# Altium PCB sot23-5-op-amp-proto__A.PcbDoc
Units mil, origin at the board's own origin, x right, y up, seen from the top; angles counter-clockwise.
Board outline 750 x 500 mil, 2 copper layers (Top Layer, Bottom Layer), stack 61.7 mil thick; 27 components, 11 nets, 50 pads, 3 vias.
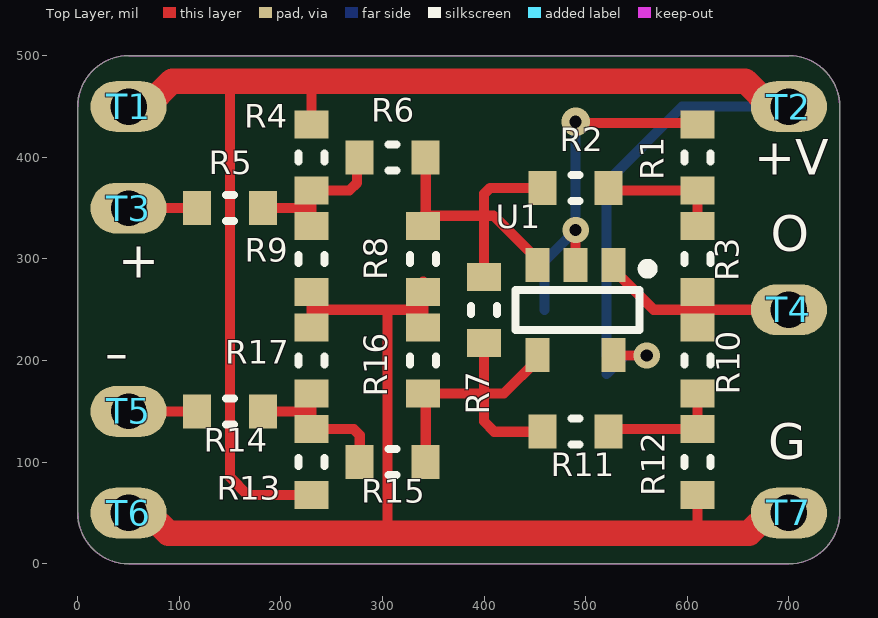
[diagram p0: Top Layer view]
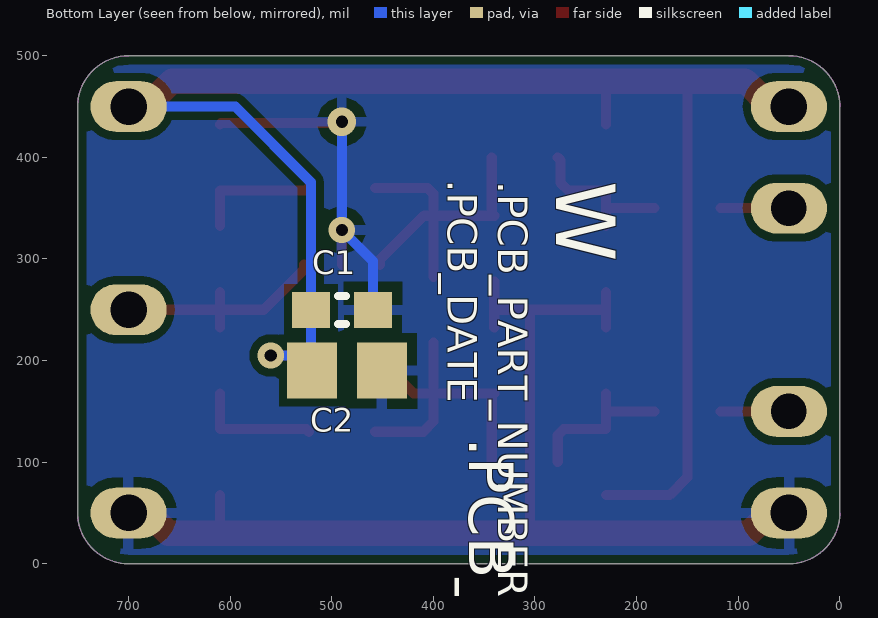
[diagram p1: Bottom Layer view, seen from below]
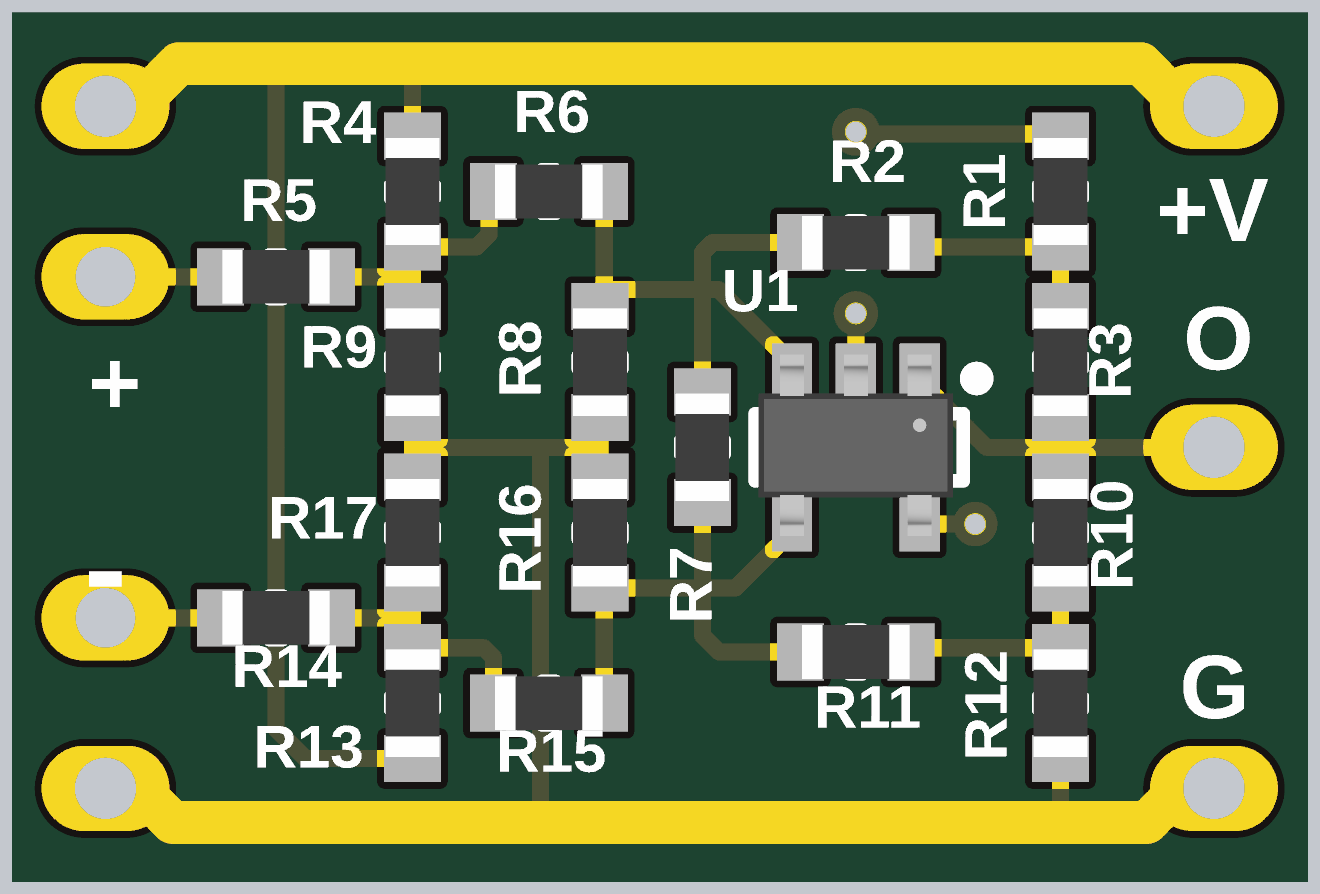
[diagram p2: 3D render of the assembled board from above, using the file's embedded part models]

## Layer stack, top to bottom
Top Solder: solder mask 0.4, Solder Resist, Dk 3.5
Top Layer: signal copper 1.4
Dielectric1: dielectric 58.9, FR-4, Dk 4.8
Bottom Layer: signal copper 1.4
Bottom Solder: solder mask 0.4, Solder Resist, Dk 3.5

## Board outline
0,50 0,450 cw(c50,450) 50,500 700,500 cw(c700,450) 750,450 750,50 cw(c700,50) 700,0 50,0 cw(c50,50)

## Design rules (kind name [scope] priority, off if disabled: settings)
Clearance [All] p1: gap=6 ignorepadtopadclearanceinfootprint=FALSE except(0: Arc-Hole Track-Hole SMDPad-Hole THPad-Hole Via-Hole Fill-Hole Poly-Hole Region-Hole Text-Hole; 8: Arc-Poly Track-Poly SMDPad-Poly THPad-Poly Via-Poly Fill-Poly Poly-Poly)
PolygonConnect [All] p1: connectstyle=Relief reliefconductorwidth=10 reliefentries=4 polygonreliefangle="90 Angle" airgapwidth=10
RoutingVias [All] p1: holewidth=12 width=26 viastyle="Through Hole" minholewidth=12 minwidth=26 maxholewidth=50 maxwidth=75
SilkToSolderMaskClearance SilkscreenOverComponentPads [IsPad] p1: minsilkscreentomaskgap=10 clearancetoexposedcopper=TRUE
SolderMaskExpansion [All] p1: expansion=4 istentingtop=FALSE
SupplyNets "Schematic Supply Nets_1" [InNet('GND')] p1: voltage=0.000
SupplyNets "Schematic Supply Nets" [InNet('+V')] p2: voltage=0.000
Width [All] p1: maxlimit=200 minlimit=6 preferedwidth=6
29 further rules are at their usual default settings.

## Components (designator, comment, footprint, x,y, rotation, side; value= is the part's Value field where it differs from the comment)
C1 "0.1µF" C0603_0.90MM_MD 490,250 r0 bottom
C2 "10µF" C0805_1.40MM_MD 485,190 r0 bottom
R1 "470k" R0603_0.55MM_MD 610,400 r90 top
R2 "470k" R0603_0.55MM_MD 490,370 r180 top
R3 "470k" R0603_0.55MM_MD 610,300 r90 top
R4 "470k" R0603_0.55MM_MD 230,400 r90 top
R5 "470k" R0603_0.55MM_MD 150,350 r180 top
R6 "470k" R0603_0.55MM_MD 310,400 r180 top
R7 "470k" R0603_0.55MM_MD 400,250 r90 top
R8 "470k" R0603_0.55MM_MD 340,300 r90 top
R9 "470k" R0603_0.55MM_MD 230,300 r90 top
R10 "470k" R0603_0.55MM_MD 610,200 r90 top
R11 "470k" R0603_0.55MM_MD 490,130 r180 top
R12 "470k" R0603_0.55MM_MD 610,100 r90 top
R13 "470k" R0603_0.55MM_MD 230,100 r270 top
R14 "470k" R0603_0.55MM_MD 150,150 r180 top
R15 "470k" R0603_0.55MM_MD 310,100 r180 top
R16 "470k" R0603_0.55MM_MD 340,200 r270 top
R17 "470k" R0603_0.55MM_MD 230,200 r270 top
T1 "SOLDER_HOLE" "SOLDER_HOLE -  22AWG" 50,450 r270 top
T2 "SOLDER_HOLE" "SOLDER_HOLE -  22AWG" 700,450 r270 top
T3 "SOLDER_HOLE" "SOLDER_HOLE -  24AWG" 50,350 r270 top
T4 "SOLDER_HOLE" "SOLDER_HOLE -  22AWG" 700,250 r270 top
T5 "SOLDER_HOLE" "SOLDER_HOLE -  24AWG" 50,150 r270 top
T6 "SOLDER_HOLE" "SOLDER_HOLE -  22AWG" 50,50 r270 top
T7 "SOLDER_HOLE" "SOLDER_HOLE -  22AWG" 700,50 r90 top
U1 "OPA320AIDBVR" SOT23-5 490,250 r270 top

## Footprints (in the part's own frame and the unit in brackets; to place one, negate y for a bottom-side part, rotate by r counter-clockwise, add the part's x,y. Pads: shape width x height; smd on the part's side, far side on the other; paste and mask are expansions set on the pad)
C0603_0.90MM_MD [mm] "Capacitor 0603 - Medium Density"
  rect 0.95x0.9 smd: 1(-0.775,0) 2(0.775,0)
  silkscreen extent -0.1,-0.35 0.1,0.35, body extent -0.8,-0.4 0.8,0.4, height 0.9
C0805_1.40MM_MD [mm] "Capacitor - 0805 - Medium Density"
  rect 1.25x1.4 smd: 1(-0.875,0) 2(0.875,0)
  body extent -1,-0.62 1,0.63, height 1.45
R0603_0.55MM_MD [mm] "Resistor 0603 Medium Density"
  rect 0.7x0.85 smd: 1(-0.825,0) 2(0.825,0)
  silkscreen extent -0.1,-0.33 0.1,0.33, body extent -0.8,-0.4 0.8,0.4, height 0.55
"SOLDER_HOLE -  22AWG" [mil]
  oval 50x75 hole 36: 1(0,0)
"SOLDER_HOLE -  24AWG" [mil]
  oval 50x75 hole 35: 1(0,0)
SOT23-5 [mm] "SOT23, 5-Leads, Body 3.1x2.6mm (max), Pitch 0.95mm, IPC High Density"
  rect 0.85x0.6 smd: 1(-1.125,0.95) 2(-1.125,0) 3(-1.125,-0.95) 4(1.125,-0.95) 5(1.125,0.95)
  silkscreen extent -1.15,-1.5 0.5,1.93, body extent -1.38,-1.45 1.32,1.45, height 1.15

## Part data
C1: library part GCJ188R71C104KA01D, "CAP CER 0.1UF 16V X7R 0603", Manufacturer="Murata Electronics", Operating Temperature="-55°C ~ 125°C", Package=0603, Ratings=AEC-Q200, Supplier Part Number 1=490-5796-1-ND, Temperature Coefficient=X7R, Tolerance=±10%, Voltage - Rated=16V, Category=Capacitors, ComponentLink1Description="Datasheet (Internal)", ComponentLink1URL=https://www.murata.com/~/media/webrenewal/support/library/catalog/products/capacitor/mlcc/c03e.ashx?la=en-us, ComponentLink2Description="Datasheet (External)", ComponentLink2URL=https://www.murata.com/~/media/webrenewal/support/library/catalog/products/capacitor/mlcc/c03e.ashx?la=en-us, Manufacturer Part Number=GCJ188R71C104KA01D, Substitution Notes="0.1µF , 16V , ±10% , X7R , -55°C ~ 125°C , AEC-Q200 , 0603", Supplier 1=Digikey, Thickness (Max)=0.90MM
C2: library part GCM21BR71A106KE22K, "CAP CER 10UF 10V X7R 0805", Manufacturer="Murata Electronics", Operating Temperature="-55°C ~ 125°C", Package=0805, Ratings=AEC-Q200, Supplier Part Number 1=490-14531-1-ND, Temperature Coefficient=X7R, Tolerance=±10%, Voltage - Rated=10V, Category=Capacitors, ComponentLink1Description="Datasheet (Internal)", ComponentLink1URL=https://search.murata.co.jp/Ceramy/image/img/A01X/G101/ENG/GCM21BR71A106KE22-01.pdf, ComponentLink2Description="Datasheet (External)", ComponentLink2URL=https://search.murata.co.jp/Ceramy/image/img/A01X/G101/ENG/GCM21BR71A106KE22-01.pdf, Manufacturer Part Number=GCM21BR71A106KE22K, Substitution Notes="10µF , 10V , ±10% , X7R , -55°C ~ 125°C , AEC-Q200 , 0805", Supplier 1=Digikey, Thickness (Max)=1.40MM
R1 R2 R3 R4 R5 R6 R7 R8 R9 R10 R11 R12 R13 R14 R15 R16 R17: library part ERJ-3EKF4703V, "RES 470K OHM 1/10W 1% 0603 SMD", Limiting Element Voltage=75, Manufacturer="Panasonic Electronic Components", Maximum Overload Voltage=150, Maximum Working Voltage=75.0V, Package="0603 (1608 Metric)", Package Power="0603  (0.1W)", Power (Watts)="0.1W- 1/10W", Ratings=AEC-Q200, Sort Value=470000, Sort Value Package=603_470000, Supplier Package=0603, Supplier Part Number 1=P470KHCT-ND, Temperature Coefficient=±100ppm/°C, Tolerance=±1%, Category=Resistors, ComponentLink1Description="Internal Datasheet", ComponentLink1URL="datasheets\Panasonic Electronic Components\AOA0000CE2.pdf", ComponentLink2Description="External Datasheet", ComponentLink2URL=http://industrial.panasonic.com/www-data/pdf/AOA0000/AOA0000CE2.pdf, Composition="Thick Film", Features=-, Height=0.55MM, Manufacturer Part Number=ERJ-3EKF4703V, Number of Terminations=2, Packaging="Cut Tape (CT)", Resistance (Ohms)=470k, Size / Dimension="0.063\" L x 0.031\" W (1.60mm x 0.80mm)", Substitution Notes="470k , ±1% , 0603 , AEC-Q200", Supplier 1=Digi-Key
T1 T2 T3 T4 T5 T6 T7: "A Generic Hole for attaching flying leads"
U1: "IC OPAMP GP 20MHZ RRO SOT23-5", Current - Supply=1.5mA, Manufacturer="Texas Instruments", Operating Temperature="-40°C ~ 125°C", Package / Case="SC-74A, SOT-753", Supplier Device Package=SOT-23-5, Supplier Part Number 1=296-29480-1-ND, Voltage - Supply, Single/Dual (±)="1.8 V ~ 5.5 V, ±0.9 V ~ 2.75 V", Amplifier Type="General Purpose", Category="Integrated Circuits (ICs)", ComponentLink1Description=http://www.ti.com/lit/ds/symlink/opa320.pdf, ComponentLink1URL=http://www.ti.com/lit/ds/symlink/opa320.pdf, Manufacturer Part Number=OPA320AIDBVR, Mounting Type="Surface Mount", Output Type=Rail-to-Rail, Packaging="Cut Tape (CT)", Part Status=Active, Pricing 1="1=2.19, 10=1.965, 100=1.5796, 500=1.2978, 1000=1.07532 (USD)", RoHS="RoHS Compliant", Slew Rate="10 V/µs", Stock 1=11262, Supplier 1=Digi-Key

## Via types
v1: diameter 26, hole 12, Top Layer to Bottom Layer, tented both sides, 2 vias
v2: diameter 28, hole 12, Top Layer to Bottom Layer, tented both sides, 1 vias

## Nets (pads, with @x,y where several pads share a name; then routed paths per layer and width w, separated by ;. In a path a pad name is that pad's centre, name@x,y a point inside that pad or via, vN(x,y) a via of type N, cw(c..) or ccw(c..) an arc to the next point about the centre after c; other vN are vias at no path point)
+V: C1.2 C2.2 R4.2 R13.2 T1.1 T2.1 U1.5 | length 1669.5
  Top Layer w10: 155,475 150,470 150,85 167.48,67.52 R13.2 ; R4.2 230,475 ; U1.5 528.11,205 v1(560,205)
  Top Layer w25: T1.1@67.91,450 92.91,475 155,475 230,475 657.09,475 T2.1@682.09,450
  Top Layer w30: T1.1 T1.1@67.91,450 ; T2.1@682.09,450 T2.1
  Bottom Layer w10: C2.2@520.51,186.78 C2.2@537.29,203.56 ; v1(560,205) 520.51,205 520.51,375.51 595,450 T2.1
GND: C1.1 C2.1 R1.2 R8.1 R9.1 R12.1 R16.1 R17.1 T6.1 T7.1 U1.2 | length 1467.1
  Top Layer w10: T6.1 T6.1@62.5,50 ; R17.1 230,250 ; R9.1 230,250 ; 305,30 305,250 ; R16.1 340,250 ; R8.1@340,277.52 340,250 ; U1.2 v1(490.01,328.54) ; v2(490,435) 491.26,433.74 608.74,433.74 R1.2 ; 610,30 R12.1 ; T7.1@687.5,50 T7.1 ; 230,250 305,250 ; 305,250 340,250
  Top Layer w25: T6.1@62.5,50 69.26,50 89.26,30 305,30 610,30 660.74,30 680.74,50 T7.1@687.5,50
  Bottom Layer w10: C1.1 459.49,298.01 v1(490.01,328.54) v2(490,435)
NetR1_1: R1.1 R2.1 R3.2 | length 123.6
  Top Layer w10: R2.1 524.96,367.52 R1.1 R3.2
NetR2_2: R2.2 R6.1 R7.2 R8.2 U1.3 | length 335.6
  Top Layer w10: R6.1 342.48,344.96 340,342.48 400,342.48 ; R7.2 400,342.48 ; U1.3 452.6,299.21 409.33,342.48 400,342.48 ; R2.2 405.86,370 400,364.14 400,342.48
NetR3_1: R3.1 R10.2 T4.1 U1.1 | length 228.9
  Top Layer w10: U1.1 527.4,289.37 566.77,250 610,250 ; R10.2 610,250 ; R3.1 610,255 610,250 ; T4.1 610,250
NetR4_1: R4.1 R5.1 R6.2 R9.2 | length 156.7
  Top Layer w10: R5.1 230,350 ; R9.2 230,350 ; R6.2 275,397.48 275,375 267.52,367.52 R4.1 230,350
NetR5_2: R5.2 T3.1 | length 67.5
  Top Layer w10: T3.1 R5.2
NetR7_1: R7.1 R11.2 R15.1 R16.2 U1.4 | length 339
  Top Layer w10: R15.1 342.48,165.04 R16.2 400,167.52 ; R7.1 400,167.52 ; U1.4 452.6,200.79 419.33,167.52 400,167.52 ; R11.2 410,130 400,140 400,167.52
NetR10_1: R10.1 R11.1 R12.2 | length 123.6
  Top Layer w10: R11.1 524.96,132.48 R12.2 R10.1
NetR13_1: R13.1 R14.1 R15.2 R17.2 | length 159.1
  Top Layer w10: R14.1 230,150 ; R17.2 230,150 ; R15.2 277.52,126.62 271.66,132.48 R13.1 230,150
NetR14_2: R14.2 T5.1 | length 67.5
  Top Layer w10: T5.1 R14.2

## Polygon pours and split planes (outlines as drawn)
GND on Bottom Layer "NONET_L-01_P-001" (solid, remove dead copper, pour order 0): -30,-20 -30,535 790,535 790,-20

## Keep-outs
Keep-Out Layer:
  the board outline again, w1

## Silkscreen, mask and mechanical layers (free items; w line width, h text height)
Top Overlay:
  text "+V" at 666,371 h60
  text "O" at 682,295.71 h60
  text "+" at 40,269.47 h60
  text "-" at 26.25,170.04 h85
  text "G" at 679.85,91.28 h60
Bottom Overlay:
  text ".PCB_DATE" at 395.77,377.9 h50 r90
  text "W" at 298.13,376.62 h100 r90
  text ".PCB_PART_NUMBER" at 345.77,376.64 h50 r90
  text ".PCB_MIXDOWN" at 379,124.1 h75 r90
[8] Board Outline:
  the board outline again, w10